# Altium PCB Test.PcbDoc (part 4 of 9)
Units mm, origin at the board's own origin, x right, y up, seen from the top; angles counter-clockwise.
Board outline 152.4 x 101.6 mm, 2 copper layers (Top Layer, Bottom Layer); 1 components, 0 nets, 1713 pads, 1 vias.
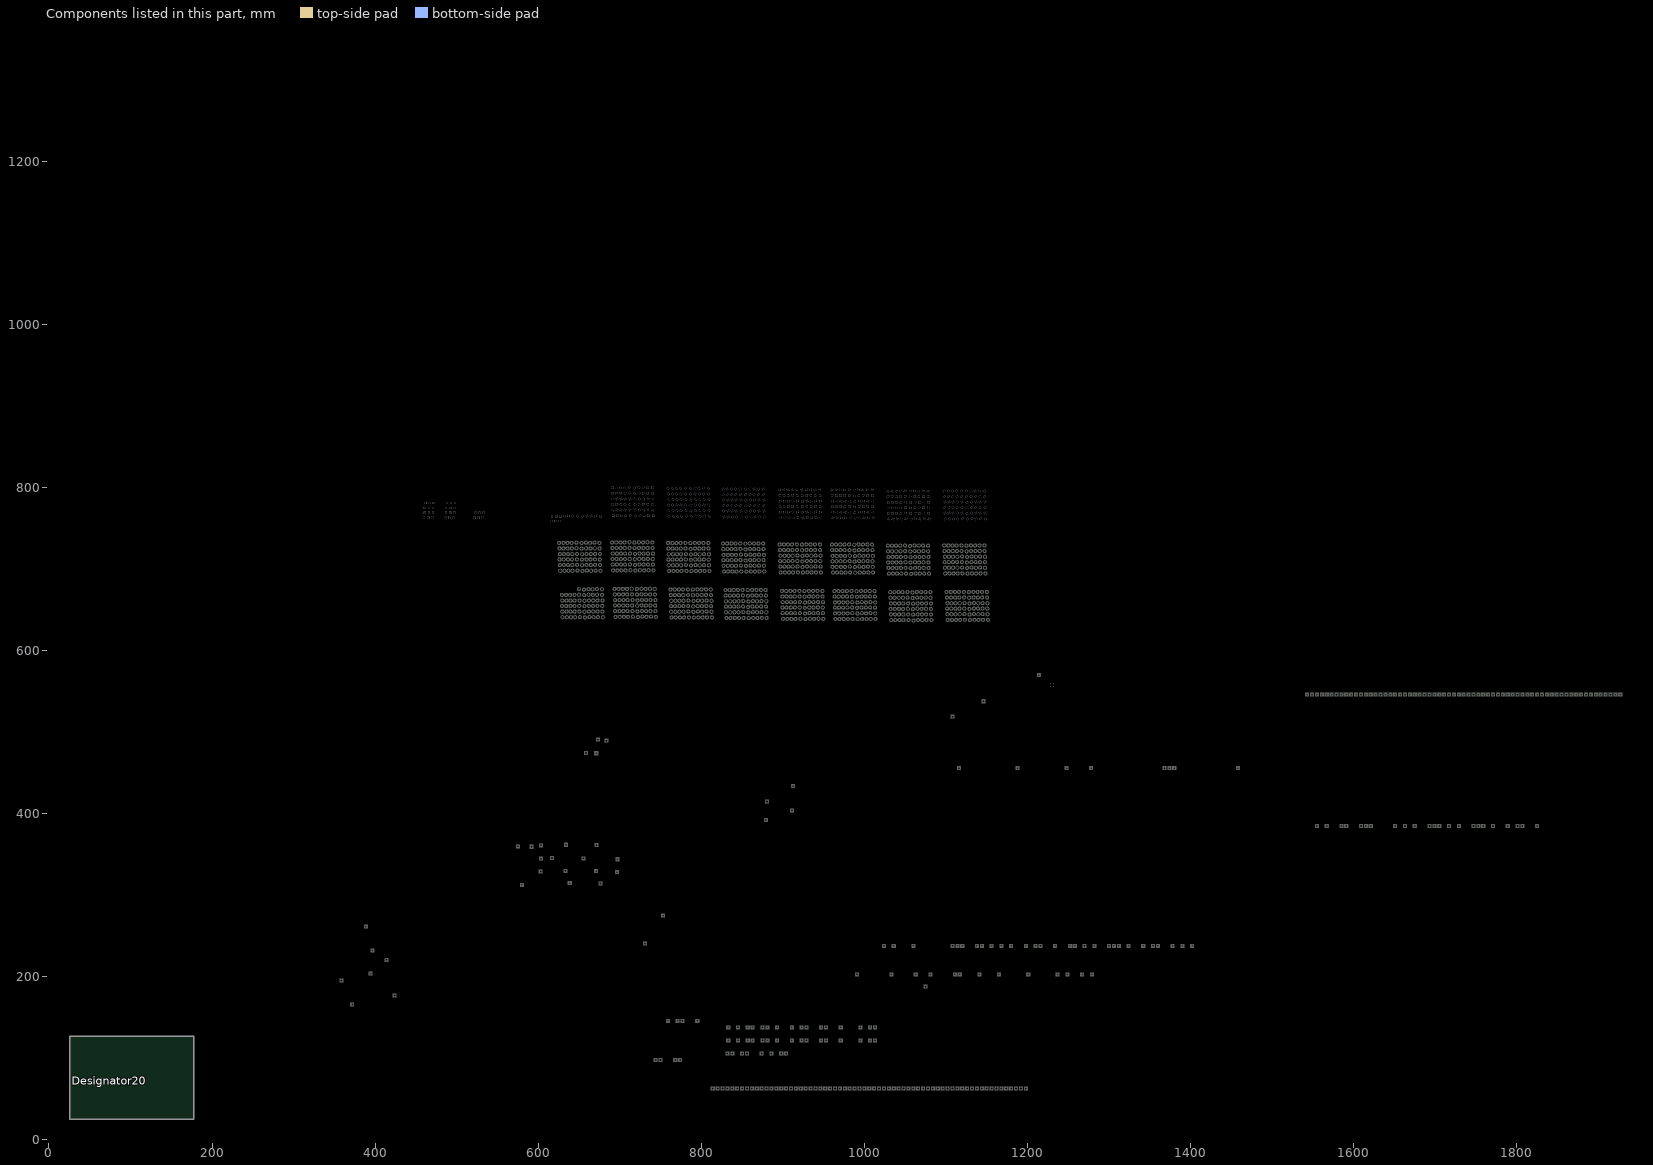
[diagram p4: the components of this part, seen from the top]

## Via types
v1: diameter 0.9, hole 0.4, Top Layer to Bottom Layer, 1 vias

## Nets (pads, with @x,y where several pads share a name; then routed paths per layer and width w, separated by ;. In a path a pad name is that pad's centre, name@x,y a point inside that pad or via, vN(x,y) a via of type N, cw(c..) or ccw(c..) an arc to the next point about the centre after c; other vN are vias at no path point) (continued)
copper on no net: (continued)
  Top Layer w0.2: 1310,203 ccw(c1309,203) 1310,203 ; 1314,300 ccw(c1313,300) 1314,300 ; 1315,351 ccw(c1314,351) 1315,351 ; 1315,456 ccw(c1314,456) 1315,456 ; 1316,203 ccw(c1315,203) 1316,203 ; 1319,238 ccw(c1318,238) 1319,238 ; 1320,300 ccw(c1319,300) 1320,300 ; 1321,351 ccw(c1320,351) 1321,351 ; 1321,456 ccw(c1320,456) 1321,456 ; 1326,300 ccw(c1325,300) 1326,300 ; 1327,351 ccw(c1326,351) 1327,351 ; 1327,456 ccw(c1326,456) 1327,456 ; 1331,238 ccw(c1330,238) 1331,238 ; 1332,300 ccw(c1331,300) 1332,300 ; 1333,351 ccw(c1332,351) 1333,351 ; 1333,456 ccw(c1332,456) 1333,456 ; 1337,238 ccw(c1336,238) 1337,238 ; 1338,300 ccw(c1337,300) 1338,300 ; 1339,351 ccw(c1338,351) 1339,351 ; 1339,456 ccw(c1338,456) 1339,456 ; 1344,300 ccw(c1343,300) 1344,300 ; 1345,351 ccw(c1344,351) 1345,351 ; 1345,456 ccw(c1344,456) 1345,456 ; 1349,238 ccw(c1348,238) 1349,238 ; 1350,300 ccw(c1349,300) 1350,300 ; 1351,351 ccw(c1350,351) 1351,351 ; 1351,456 ccw(c1350,456) 1351,456 ; 1356,300 ccw(c1355,300) 1356,300 ; 1357,351 ccw(c1356,351) 1357,351 ; 1357,456 ccw(c1356,456) 1357,456 ; 1362,300 ccw(c1361,300) 1362,300 ; 1363,351 ccw(c1362,351) 1363,351 ; 1363,456 ccw(c1362,456) 1363,456 ; 1367,238 ccw(c1366,238) 1367,238 ; 1368,300 ccw(c1367,300) 1368,300 ; 1369,351 ccw(c1368,351) 1369,351 ; 1373,238 ccw(c1372,238) 1373,238 ; 1374,300 ccw(c1373,300) 1374,300 ; 1375,351 ccw(c1374,351) 1375,351 ; 1380,300 ccw(c1379,300) 1380,300 ; 1381,351 ccw(c1380,351) 1381,351 ; 1385,238 ccw(c1384,238) 1385,238 ; 1386,300 ccw(c1385,300) 1386,300 ; 1387,351 ccw(c1386,351) 1387,351 ; 1387,456 ccw(c1386,456) 1387,456 ; 1392,300 ccw(c1391,300) 1392,300 ; 1393,351 ccw(c1392,351) 1393,351 ; 1393,456 ccw(c1392,456) 1393,456 ; 1397,238 ccw(c1396,238) 1397,238 ; 1398,300 ccw(c1397,300) 1398,300 ; 1399,456 ccw(c1398,456) 1399,456 ; 1404,300 ccw(c1403,300) 1404,300 ; 1405,456 ccw(c1404,456) 1405,456 ; 1410,300 ccw(c1409,300) 1410,300 ; 1411,456 ccw(c1410,456) 1411,456 ; 1416,300 ccw(c1415,300) 1416,300 ; 1417,456 ccw(c1416,456) 1417,456 ; 1422,300 ccw(c1421,300) 1422,300 ; 1423,456 ccw(c1422,456) 1423,456 ; 1428,300 ccw(c1427,300) 1428,300 ; 1429,456 ccw(c1428,456) 1429,456 ; 1434,300 ccw(c1433,300) 1434,300 ; 1435,456 ccw(c1434,456) 1435,456 ; 1441,456 ccw(c1440,456) 1441,456 ; 1447,456 ccw(c1446,456) 1447,456 ; 1448,385 ccw(c1447,385) 1448,385 ; 1453,456 ccw(c1452,456) 1453,456 ; 1454,385 ccw(c1453,385) 1454,385 ; 1465,456 ccw(c1464,456) 1465,456 ; 1471,456 ccw(c1470,456) 1471,456 ; 1472,385 ccw(c1471,385) 1472,385 ; 1477,456 ccw(c1476,456) 1477,456 ; 1478,385 ccw(c1477,385) 1478,385 ; 1483,456 ccw(c1482,456) 1483,456 ; 1484,385 ccw(c1483,385) 1484,385 ; 1489,456 ccw(c1488,456) 1489,456 ; 1490,385 ccw(c1489,385) 1490,385 ; 1495,456 ccw(c1494,456) 1495,456 ; 1496,385 ccw(c1495,385) 1496,385 ; 1501,456 ccw(c1500,456) 1501,456 ; 1502,385 ccw(c1501,385) 1502,385 ; 1508,385 ccw(c1507,385) 1508,385 ; 1514,385 ccw(c1513,385) 1514,385 ; 1520,385 ccw(c1519,385) 1520,385 ; 1526,385 ccw(c1525,385) 1526,385 ; 1532,385 ccw(c1531,385) 1532,385 ; 1538,385 ccw(c1537,385) 1538,385 ; 1544,385 ccw(c1543,385) 1544,385 ; 1550,385 ccw(c1549,385) 1550,385 ; 1562,385 ccw(c1561,385) 1562,385 ; 1574,385 ccw(c1573,385) 1574,385 ; 1580,385 ccw(c1579,385) 1580,385 ; 1598,385 ccw(c1597,385) 1598,385 ; 1604,385 ccw(c1603,385) 1604,385 ; 1628,385 ccw(c1627,385) 1628,385 ; 1634,385 ccw(c1633,385) 1634,385 ; 1640,385 ccw(c1639,385) 1640,385 ; 1646,385 ccw(c1645,385) 1646,385 ; 1658,385 ccw(c1657,385) 1658,385 ; 1670,385 ccw(c1669,385) 1670,385 ; 1682,385 ccw(c1681,385) 1682,385 ; 1688,385 ccw(c1687,385) 1688,385 ; 1712,385 ccw(c1711,385) 1712,385 ; 1724,385 ccw(c1723,385) 1724,385 ; 1736,385 ccw(c1735,385) 1736,385 ; 1742,385 ccw(c1741,385) 1742,385 ; 1766,385 ccw(c1765,385) 1766,385 ; 1778,385 ccw(c1777,385) 1778,385 ; 1784,385 ccw(c1783,385) 1784,385 ; 1796,385 ccw(c1795,385) 1796,385 ; 1814,385 ccw(c1813,385) 1814,385 ; 1820,385 ccw(c1819,385) 1820,385 ; 1832,385 ccw(c1831,385) 1832,385